# Altium PCB 1.pcbdoc
Units mil, origin at the board's own origin, x right, y up, seen from the top; angles counter-clockwise.
Board outline 6470 x 4120 mil, 2 copper layers (Top Layer, Bottom Layer); 42 components, 62 nets, 188 pads, 6 vias.
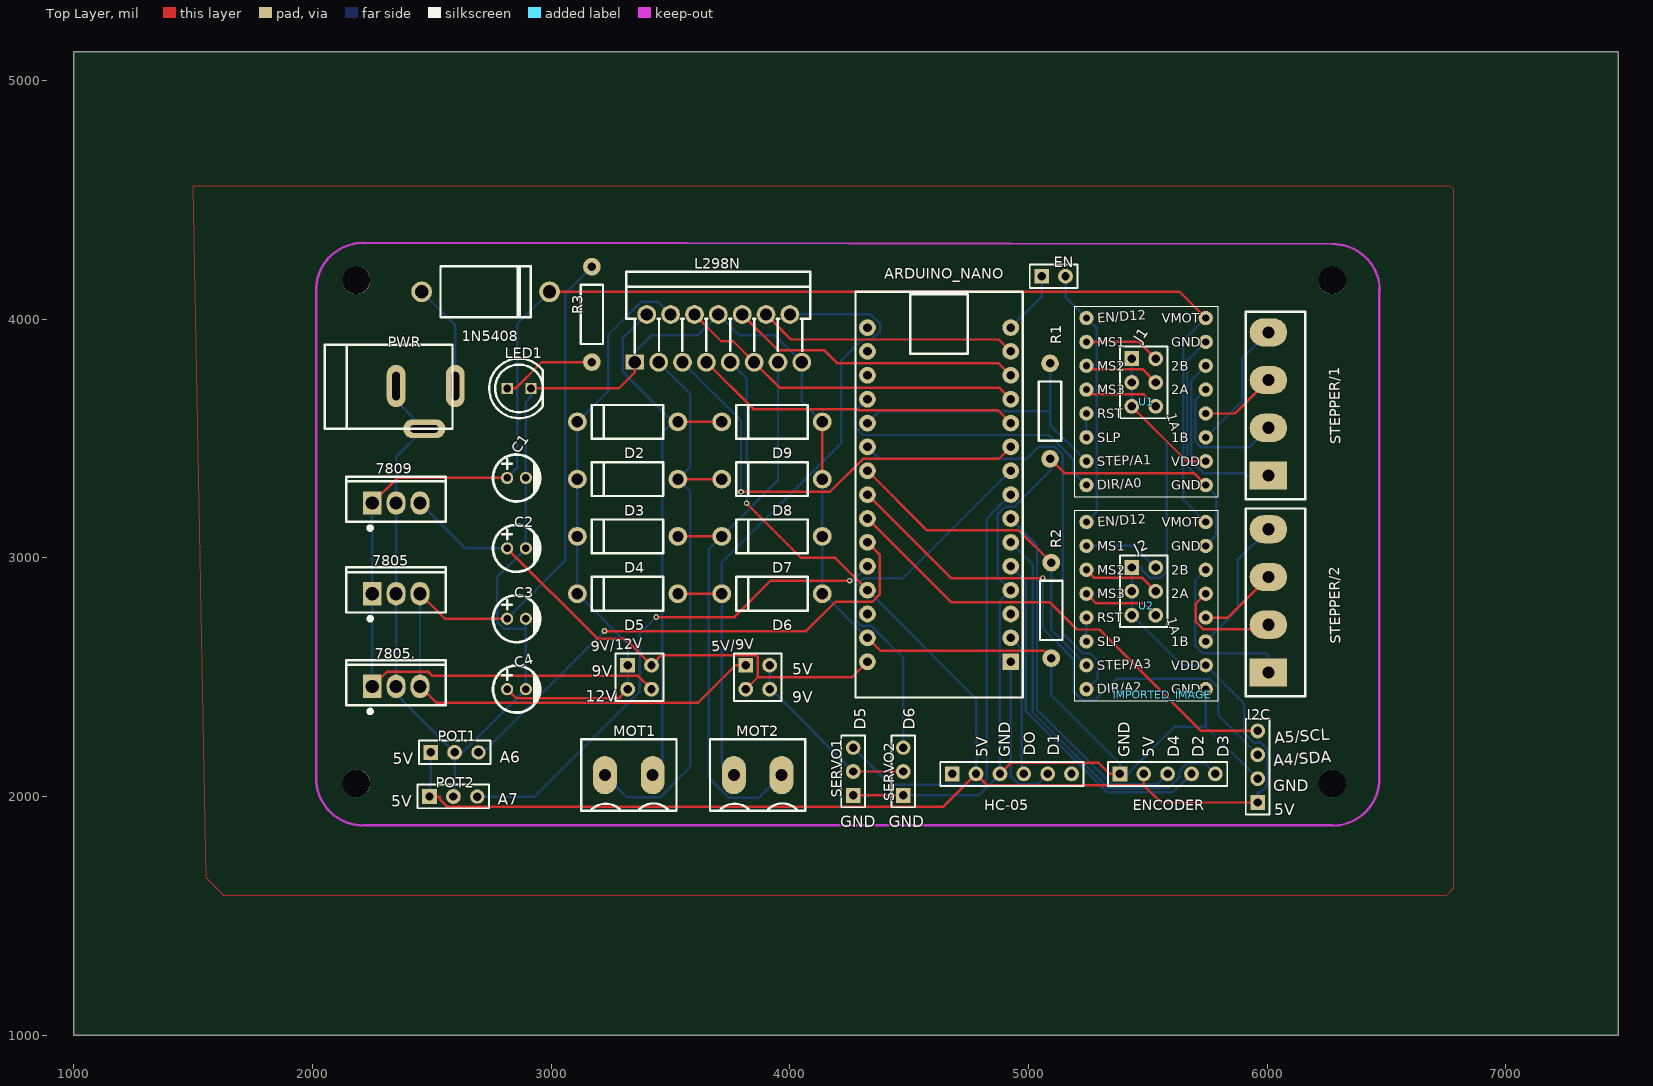
[diagram p0: Top Layer view]
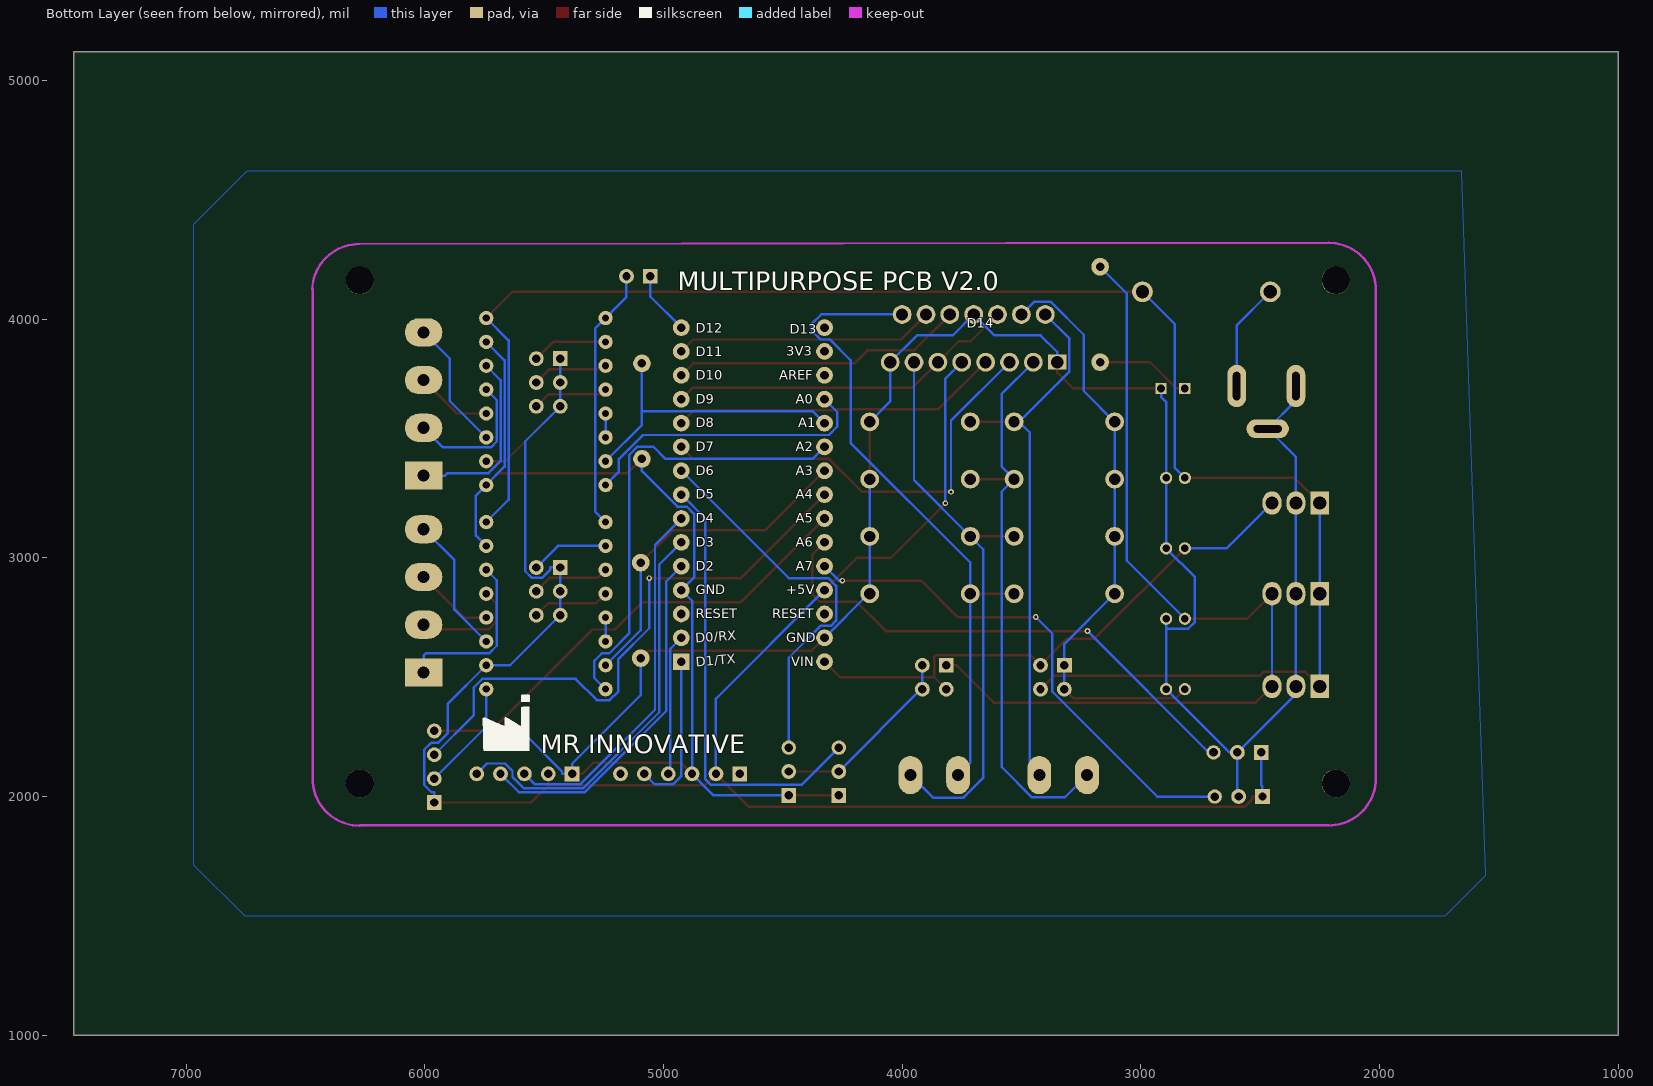
[diagram p1: Bottom Layer view, seen from below]

## Layer stack, top to bottom
Top Layer: signal copper (thickness not stored)
Dielectric: dielectric 12.6, FR-4, Dk 4.8
Bottom Layer: signal copper (thickness not stored)

## Board outline
7470,1000 1000,1000 1000,5120 7470,5120

## Components (designator, comment, footprint, x,y, rotation, side; value= is the part's Value field where it differs from the comment)
1N5408 "1N5408-C142336" DO-201_BD5.3-L9.5-P13.50-D1.4-RD 2725,4115 r180 top
5V/9V "5V/9V" HDR-M-2.54_2X2 3865,2500 r0 top
9V/12V "9V/RAW" HDR-M-2.54_2X2 3370,2500 r0 top
7805 "7805" TO-220-3_L10.0-W4.5-P2.54-L 2350,2850 r0 top
7805. "7805" TO-220-3_L10.0-W4.5-P2.54-L 2350,2461.61 r0 top
7809 "7809" TO-220-3_L10.0-W4.5-P2.54-L 2350,3230 r0 top
ARDUINO_NANO "ARDUINO_NANO_V3" ARDUINO_NANO_V3 4625,3265 r180 top
C1 "100uF" CAP-D5.0XF2.0 2815,3335 r0 top
C2 "1uF" CAP-D5.0XF2.0 2815,3040 r0 top
C3 "1uF" CAP-D5.0XF2.0 2815,2745 r0 top
C4 "47uF" CAP-D5.0XF2.0 2815,2450 r0 top
D2 "FR207" DO-15_BD3.1-L6.7-P10.70-D0.9-FD 3320,3570 r180 top
D3 "FR207" DO-15_BD3.1-L6.7-P10.70-D0.9-FD 3320,3330 r180 top
D4 "FR207" DO-15_BD3.1-L6.7-P10.70-D0.9-FD 3320,3090 r180 top
D5 "FR207" DO-15_BD3.1-L6.7-P10.70-D0.9-FD 3320,2850 r180 top
D6 "FR207" DO-15_BD3.1-L6.7-P10.70-D0.9-FD 3925,2850 r180 top
D7 "FR207" DO-15_BD3.1-L6.7-P10.70-D0.9-FD 3925,3090 r180 top
D8 "FR207" DO-15_BD3.1-L6.7-P10.70-D0.9-FD 3925,3330 r180 top
D9 "FR207" DO-15_BD3.1-L6.7-P10.70-D0.9-FD 3925,3570 r180 top
EN "HDR-F-2.54_1x2" HDR-F-2.54_1X2 5105,4180 r0 top
ENCODER "ENCODER" HDR-F-2.54_1X5 5582.5,2095 r0 top
HC-05 "HC-05" HDR-F-2.54_1X6 4880,2095 r0 top
I2C "I2C/DISPLAY" HDR-F-2.54_1X4 5960,2125 r90 top
IMPORTED_IMAGE "IMPORTED_IMAGE" IMPORTED_IMAGE 5559.3,2427.32 r0 top
J1 "HDR-M-2.54_2x3" HDR-M-2.54_2X3 5432.5,3835 r270 top
J2 "HDR-M-2.54_2x3" HDR-M-2.54_2X3 5432.5,2960 r270 top
L298N "L298N" MULTIWATT-15_L19.6-W5.0-P1.27-L 3700,3920 r0 top
LED1 "LED 5mm red" LED-5MM 2865,3710 r0 top
MOT1 "MOT1" 5.08-2P_SCREW_TERMINAL 3225,2090 r0 top
MOT2 "MOT2" 5.08-2P_SCREW_TERMINAL 3765,2090 r0 top
POT1 "POT1" HDR-F-2.54_1X3 2595,2185 r0 top
POT2 "POT2" HDR-F-2.54_1X3 2590,2000 r0 top
PWR "DC JACK" "DC JACK" 2350,3720 r0 top
R1 "200" R_AXIAL-0.4 5090,3615 r90 top
R2 "200" R_AXIAL-0.4 5095,2780 r90 top
R3 "200" R_AXIAL-0.4 3170,4020 r90 top
SERVO1 "SERVO1" HDR-F-2.54_1X3 4265,2105 r90 top
SERVO2 "SERVO2" HDR-F-2.54_1X3 4475,2105 r90 top
STEPPER/1 "STP1" SCREW_TERMINAL_5.08MM_4P_ANGLED 6005,3345 r90 top
STEPPER/2 "STP2" SCREW_TERMINAL_5.08MM_4P_ANGLED 6005,2520 r90 top
U1 "A4988" "A4988 STEPPER MOTOR DRIVER CARRIER" 5187.5,3255 r0 top
U2 "A4988" "A4988 STEPPER MOTOR DRIVER CARRIER" 5187.5,2400 r0 top

## Footprints (in the part's own frame and the unit in brackets; to place one, negate y for a bottom-side part, rotate by r counter-clockwise, add the part's x,y. Pads: shape width x height; smd on the part's side, far side on the other; paste and mask are expansions set on the pad)
5.08-2P_SCREW_TERMINAL [mil]
  oval 100x160 hole 50 paste+0 mask+4: 1(0,0) 2(200,0)
  silkscreen extent -100,-150 300,150
"A4988 STEPPER MOTOR DRIVER CARRIER" [mil]
  round 60 hole 30 paste+0 mask+4: 1(55,750) 2(55,650) 3(55,550) 4(55,450) 5(55,350) 6(55,250) 7(55,150) 8(55,50) 9(555,50) 10(555,150) 11(555,250) 12(555,350) 13(555,450) 14(555,550) 15(555,650) 16(555,750)
  silkscreen extent 5,0 605,800
ARDUINO_NANO_V3 [mil]
  rect 70x70 hole 36 paste+0 mask+4: 1(-300,700)
  round 70 hole 36 paste+0 mask+4: 2(-300,600) 3(-300,500) 4(-300,400) 5(-300,300) 6(-300,200) 7(-300,100) 8(-300,0) 9(-300,-100) 10(-300,-200) 11(-300,-300) 12(-300,-400) 13(-300,-500) 14(-300,-600) 15(-300,-700) 16(300,-700) 17(300,-600) 18(300,-500) 19(300,-400) 20(300,-300) 21(300,-200) 22(300,-100) 23(300,0) 24(300,100) 25(300,200) 26(300,300) 27(300,400) 28(300,500) 29(300,600) 30(300,700)
  silkscreen extent -350,-850 350,850
CAP-D5.0XF2.0 [mm]
  round 1.3 hole 0.8 paste+0 mask+0.102: 1(0,0) 2(2,0)
  silkscreen extent -1.5,-2.5 3.5,2.5
"DC JACK" [mm]
  oval 2x4.5 hole 0.8 slot 3 at 90 deg paste+0 mask+0.102: 1(6.3,0) 2(0,0)
  oval 4.5x2 hole 0.8 slot 3 at 0 deg paste+0 mask+0.102: 3(3,-4.549)
  silkscreen extent -7.6,-4.55 6,4.4
DO-15_BD3.1-L6.7-P10.70-D0.9-FD [mm]
  round 2 hole 1.2 paste+0 mask+0.102: 1(-5.35,0) 2(5.35,0)
  silkscreen extent -3.8,-1.8 3.8,1.8
DO-201_BD5.3-L9.5-P13.50-D1.4-RD [mm]
  round 2.2 hole 1.4 paste+0 mask+0.102: 1(-6.8,0) 2(6.8,0)
  silkscreen extent -4.8,-2.7 4.8,2.7
HDR-F-2.54_1X2 [mil]
  rect 62x62 hole 35 paste+0 mask+4: 1(-50,0)
  round 62 hole 35 paste+0 mask+4: 2(50,0)
  silkscreen extent -100,-49 100,50
HDR-F-2.54_1X3 [mil]
  rect 62x62 hole 35 paste+0 mask+4: 1(-100,0)
  round 62 hole 35 paste+0 mask+4: 2(0,0)
  round 60 hole 36 paste+0 mask+4: 3(100,0)
  silkscreen extent -150,-49 150,50
HDR-F-2.54_1X4 [mil]
  rect 62x62 hole 35 paste+0 mask+4: 1(-150,0)
  round 62 hole 35 paste+0 mask+4: 2(-50,0) 3(50,0) 4(150,0)
  silkscreen extent -200,-50 200,50
HDR-F-2.54_1X5 [mil]
  rect 62x62 hole 35 paste+0 mask+4: 1(-200,0)
  round 62 hole 35 paste+0 mask+4: 2(-100,0) 3(0,0) 4(100,0) 5(200,0)
  silkscreen extent -250,-50 250,50
HDR-F-2.54_1X6 [mil]
  rect 62x62 hole 35 paste+0 mask+4: 1(-200,0)
  round 62 hole 35 paste+0 mask+4: 2(-100,0) 3(0,0) 4(100,0) 5(200,0) 6(300,0)
  silkscreen extent -250,-50 350,50
HDR-M-2.54_2X2 [mil]
  rect 62x62 hole 35 paste+0 mask+4: 1(-50,50)
  round 62 hole 35 paste+0 mask+4: 2(50,50) 3(-50,-50) 4(50,-50)
  silkscreen extent -100,-100 100,100
HDR-M-2.54_2X3 [mil]
  rect 62x62 hole 35 paste+0 mask+4: 1(0,0)
  round 62 hole 35 paste+0 mask+4: 2(0,100) 3(100,0) 4(100,100) 5(200,0) 6(200,100)
  silkscreen extent -50,-50 250,150
IMPORTED_IMAGE [mil]
LED-5MM [mil]
  rect 47.7x47.7 hole 32 paste+0 mask+4: 1(-50,0) 2(50,0)
  silkscreen extent -125,-125 100,125
MULTIWATT-15_L19.6-W5.0-P1.27-L [mm]
  rect 2x1.6 hole 1.3 paste+0 mask+0.102: 1(-8.89,-2.54)
  round 2 hole 1.3 paste+0 mask+0.102: 2(-7.62,2.54) 3(-6.35,-2.54) 4(-5.08,2.54) 5(-3.81,-2.54) 6(-2.54,2.54) 7(-1.27,-2.54) 8(0,2.54) 9(1.27,-2.54) 10(2.54,2.54) 11(3.81,-2.54) 12(5.08,2.54) 13(6.35,-2.54) 14(7.62,2.54) 15(8.89,-2.54)
  silkscreen extent -9.8,-1.52 9.8,7.09
R_AXIAL-0.4 [mil]
  round 74 hole 35.4 paste+0 mask+4: 1(-200,0) 2(200,0)
  silkscreen extent -124,-47 124,47
SCREW_TERMINAL_5.08MM_4P_ANGLED [mm]
  rect 3x4 hole 1.3 paste+0 mask+0.102: 1(0,0)
  oval 3x4 hole 1.3 paste+0 mask+0.102: 2(5.08,0) 3(10.16,0) 4(15.24,0)
  silkscreen extent -2.55,-3.93 17.45,2.42
TO-220-3_L10.0-W4.5-P2.54-L [mm]
  rect 2x2.5 hole 1.4 paste+0 mask+0.102: 1(-2.54,0)
  oval 2x2.5 hole 1.4 paste+0 mask+0.102: 2(0,0) 3(2.54,0)
  silkscreen extent -5.3,-2.86 5.3,2.8

## Free pads (board coordinates)
  round 118.11 hole 118.11 unplated paste+0: ""(2182.5,2055) ""(2182.5,4163.75) ""(6272.5,2055) ""(6272.5,4163.75)

## Via types
v1: diameter 24.02, hole 12.2, Top Layer to Bottom Layer, tented both sides, 6 vias

## Nets (pads, with @x,y where several pads share a name; then routed paths per layer and width w, separated by ;. In a path a pad name is that pad's centre, name@x,y a point inside that pad or via, vN(x,y) a via of type N, cw(c..) or ccw(c..) an arc to the next point about the centre after c; other vN are vias at no path point)
5V: ARDUINO_NANO.27 ENCODER.2 HC-05.2 I2C.1 J1.1 J1.3 J1.5 J2.1 J2.3 J2.5 L298N.9 POT1.1 POT2.1 U1.10 U2.10 | length 8930
  Top Layer w10.24: POT2.1 2532.5,2000 2532.5,1989.4 2565.1,1956.8 4641.8,1956.8 HC-05.2 4828.2,2046.8 5482.5,2046.8 ; v1(3818.6,3228.8) 4047.5,2999.9 4190.1,2999.9 ARDUINO_NANO.27 ; J1.5 5662.5,3405 U1.10 ; ENCODER.2 5482.5,2046.8 ; I2C.1 5554.3,1975 5482.5,2046.8
  Bottom Layer w10.24: POT2.1 2490,2042.5 2495,2047.5 POT1.1 ; L298N.9 3818.6,3751.4 v1(3818.6,3228.8) ; ARDUINO_NANO.27 4780,2410 HC-05.2 ; J1.1 J1.3 J1.5 5579,3488.5 5579,2944 5552.5,2917.5 5506.9,2917.5 5475,2949.4 5475,2960 J2.1 J2.3 J2.5 5642.5,2550 U2.10 5903.3,2389.2 5903.3,2266.8 5945.1,2225 5973.8,2225 6002.5,2196.3 6002.5,2049.4 5970.6,2017.5 5960,2017.5 I2C.1
+5V: 5V/9V.1 7805.3 7805..3 C3.1 R3.2 | length 3877.4
  Top Layer w10.24: 7805..3 2518.6,2393 3615.5,2393 3772.5,2550 5V/9V.1 ; 7805.3 2555,2745 C3.1
  Bottom Layer w10.24: 7805..3 7805.3 ; C3.1 3058.5,2988.5 3058.5,4108.5 R3.2
+9V: 5V/9V.3 9V/12V.2 7809.3 ARDUINO_NANO.30 C2.1 | length 2360
  Top Layer w10.24: C2.1 3193.4,2661.6 3308.4,2661.6 9V/12V.2 3462.5,2592.5 3857.5,2592.5 3865,2585 3865,2500 ; 5V/9V.3 3865,2500 ; ARDUINO_NANO.30 4260,2500 3865,2500
  Bottom Layer w10.24: 7809.3 2640,3040 C2.1
A0: ARDUINO_NANO.19 U1.8 | length 1241
  Bottom Layer w10.24: ARDUINO_NANO.19 4271.5,3611.5 4271.5,3550.1 4306.7,3515 5086.2,3515 5188.1,3413 5188.1,3359.4 U1.8
A1: ARDUINO_NANO.20 R1.2 U1.7 | length 1258.9
  Bottom Layer w10.24: ARDUINO_NANO.20 4375,3615 5090,3615 ; R1.2 5090,3615 ; U1.7 5090,3557.5 5090,3615
A2: ARDUINO_NANO.21 U2.8 | length 1954.1
  Bottom Layer w10.24: ARDUINO_NANO.21 4375,3415 4991.8,3415 5042.8,3466 5107.9,3466 5143.6,3430.3 5143.6,2683.5 5227.1,2600 5258.5,2600 5289.8,2568.7 5289.8,2497.3 U2.8
A3: ARDUINO_NANO.22 R2.2 U2.7 | length 1420.6
  Top Layer w10.24: ARDUINO_NANO.22 4575,3115 4960,3115 R2.2
  Bottom Layer w10.24: R2.2 5095,2697.5 U2.7
A4: ARDUINO_NANO.23 I2C.3 | length 2431
  Top Layer w10.24: ARDUINO_NANO.23 4675,2915 v1(5059.5,2915)
  Bottom Layer w10.24: v1(5059.5,2915) 5059.5,2705.2 5188.7,2575.9 5188.7,2440.4 5225.3,2403.8 5278.9,2403.8 5368,2492.9 5758.9,2492.9 5793.9,2457.9 5793.9,2341.1 I2C.3
A5: ARDUINO_NANO.24 I2C.4 | length 2003.7
  Top Layer w10.24: ARDUINO_NANO.24 4675,2815 5088.1,2815 5203.1,2700 5297.8,2700 5722.8,2275 I2C.4
A6: ARDUINO_NANO.25 POT1.3 | length 2194.4
  Top Layer w10.24: v1(3223.5,2693.2) 4068,2693.2 4191.3,2816.5 4345.7,2816.5 4375.9,2846.7 4375.9,3014.1 ARDUINO_NANO.25
  Bottom Layer w10.24: POT1.3 2715.3,2185 v1(3223.5,2693.2)
A7: ARDUINO_NANO.26 POT2.3 | length 2177.1
  Top Layer w10.24: v1(3439.8,2752.1) 3767.2,2752.1 3919.7,2904.6 v1(4250.2,2904.6)
  Bottom Layer w10.24: POT2.3 2930.8,2000 3370,2439.2 3370,2682.3 v1(3439.8,2752.1) ; v1(4250.2,2904.6) 4264.6,2904.6 ARDUINO_NANO.26
ARDUINO_NANO_3: ARDUINO_NANO.3
ARDUINO_NANO_15: ARDUINO_NANO.15 EN.1 | length 268.8
  Bottom Layer w10.24: ARDUINO_NANO.15 5055,4095 EN.1
ARDUINO_NANO_16: ARDUINO_NANO.16
ARDUINO_NANO_17: ARDUINO_NANO.17
ARDUINO_NANO_18: ARDUINO_NANO.18
ARDUINO_NANO_28: ARDUINO_NANO.28
CN1_1: STEPPER/1.1 U1.14 | length 772.7
  Bottom Layer w10.24: U1.14 5682,3744.5 5682,3405.4 5732.4,3355 5904.8,3355 5914.8,3345 STEPPER/1.1
CN1_2: STEPPER/1.2 U1.13 | length 585.9
  Bottom Layer w10.24: U1.13 5698.6,3661.1 5698.6,3487.7 5723.1,3463.2 5923.2,3463.2 STEPPER/1.2
CN1_3: STEPPER/1.3 U1.12 | length 320.5
  Top Layer w10.24: U1.12 5865,3605 STEPPER/1.3
CN1_4: STEPPER/1.4 U1.11 | length 548.7
  Bottom Layer w10.24: U1.11 5895.5,3658 5895.5,3835.5 STEPPER/1.4
CN2_1: STEPPER/2.1 U2.14 | length 730.3
  Bottom Layer w10.24: U2.14 5698.6,2906.1 5698.6,2632 5730.7,2600 5995.6,2600 6005,2590.6 STEPPER/2.1
CN2_2: STEPPER/2.2 U2.13 | length 460.1
  Top Layer w10.24: U2.13 5700.7,2808.2 5700.7,2732.9 5733,2700.6 5985.6,2700.6 STEPPER/2.2
CN2_3: STEPPER/2.3 U2.12 | length 332.9
  Top Layer w10.24: U2.12 5835,2750 STEPPER/2.3
CN2_4: STEPPER/2.4 U2.11 | length 578.7
  Bottom Layer w10.24: U2.11 5875.6,2783.1 5875.6,2990.6 STEPPER/2.4
D0: ARDUINO_NANO.2 HC-05.4 | length 592.8
  Bottom Layer w10.24: ARDUINO_NANO.2 4971.5,2618.5 4971.5,2103.5 HC-05.4
D1: ARDUINO_NANO.1 HC-05.5 | length 666.7
  Bottom Layer w10.24: ARDUINO_NANO.1 4925,2086.2 4960.1,2051 5036.1,2051 HC-05.5
D2: ARDUINO_NANO.5 ENCODER.4 | length 1499.2
  Bottom Layer w10.24: ARDUINO_NANO.5 4988.2,2901.8 4988.2,2359 5328.7,2018.5 5606,2018.5 ENCODER.4
D3: ARDUINO_NANO.6 ENCODER.5 | length 1721.8
  Bottom Layer w10.24: ARDUINO_NANO.6 5017.6,2972.4 5017.6,2353.1 5335.1,2035.6 5586.4,2035.6 5632.5,2081.8 5632.5,2106.7 5664.2,2138.4 5739.1,2138.4 ENCODER.5
D4: ARDUINO_NANO.7 ENCODER.3 | length 1540.9
  Bottom Layer w10.24: ARDUINO_NANO.7 5035.3,3054.7 5035.3,2363.7 5346.7,2052.3 5539.8,2052.3 ENCODER.3
D5: ARDUINO_NANO.8 SERVO1.3 | length 1867.8
  Bottom Layer w10.24: SERVO1.3 4420.9,2049.1 4800.9,2049.1 4823.9,2072.1 4823.9,3163.9 ARDUINO_NANO.8
D6: ARDUINO_NANO.9 SERVO2.3 | length 1633.4
  Bottom Layer w10.24: SERVO2.3 4475,2581.6 4341.6,2715 4298.6,2715 4276.5,2737 4276.5,2882.7 4308.9,2915 4475,2915 ARDUINO_NANO.9
D7: ARDUINO_NANO.10 L298N.5 | length 1852.5
  Top Layer w10.24: v1(3795,3276.9) 4167.6,3276.9 4305.7,3415 4875,3415 ARDUINO_NANO.10
  Bottom Layer w10.24: L298N.5 3795,3575 v1(3795,3276.9)
D8: ARDUINO_NANO.11 L298N.7 | length 1380.6
  Top Layer w10.24: L298N.7 3846.7,3623.3 4280.4,3623.3 4285.3,3618.5 4871.5,3618.5 ARDUINO_NANO.11
D9: ARDUINO_NANO.12 L298N.6 L298N.11 | length 1472
  Top Layer w10.24: L298N.6 3712.5,3907.5 3762.5,3907.5 L298N.11 3956.3,3713.7 4876.3,3713.7 ARDUINO_NANO.12
D10: ARDUINO_NANO.13 L298N.10 | length 1230.6
  Top Layer w10.24: L298N.10 3949.1,3870.9 4143.5,3870.9 4199.4,3815 4875,3815 ARDUINO_NANO.13
D11: ARDUINO_NANO.14 L298N.12 | length 1089.2
  Top Layer w10.24: L298N.12 4005,3915 4875,3915 ARDUINO_NANO.14
D12: EN.2 U1.1 U2.1 | length 1102.6
  Bottom Layer w10.24: EN.2 5155,4092.5 U1.1 5286.4,3961.1 5286.4,3193.9 U2.1
GND: 7805.2 7805..2 7809.2 ARDUINO_NANO.4 ARDUINO_NANO.29 C1.2 C2.2 C3.2 C4.2 D6.1 D7.1 D8.1 D9.1 ENCODER.1 HC-05.3 I2C.2 L298N.1 L298N.8 L298N.15 LED1.2 POT1.2 POT2.2 PWR.2 PWR.3 R1.1 R2.1 SERVO1.1 SERVO2.1 U1.9 U1.15 U2.9 U2.15 | length 13107
  Top Layer w10.24: LED1.2 3283,3710 3350,3777 L298N.1 ; D8.1 D9.1 ; SERVO1.1 SERVO2.1 ; ARDUINO_NANO.29 4378.5,2611.5 5063.5,2611.5 R2.1 ; HC-05.3 4926.2,2141.2 5293.8,2141.2 5340,2095 ENCODER.1 ; R1.1 5150,3355 5692.5,3355 U1.9
  Bottom Layer w10.24: PWR.2 2350,3659 PWR.3 2350,3422.8 7809.2 7805.2 7805..2 2350,2430 POT1.2 ; POT2.2 2595,2005 POT1.2 ; C3.2 2893.7,2703.5 ; LED1.2 2915,3674.6 2893.7,3653.4 C1.2 C2.2 2772.9,2919.2 2772.9,2731.5 2801,2703.5 2893.7,2703.5 ; L298N.1 3350,3863 3419.5,3932.5 3612.5,3932.5 L298N.8 3787.5,3932.5 3937.5,3932.5 L298N.15 4050,3655.6 D9.1 ; D8.1 D7.1 D6.1 4140,2850 ARDUINO_NANO.29 ; SERVO2.1 4790,2005 HC-05.3 4878.5,2096.5 4878.5,2818.5 ARDUINO_NANO.4 4871.5,2918.5 4871.5,3184.4 4902.1,3215 4941.6,3215 5090,3363.4 R1.1 ; R2.1 5095,2425 5382.5,2137.5 ENCODER.1 5425,2095 5425,2105.6 5611.9,2292.5 5742.5,2292.5 ; U2.9 5742.5,2292.5 ; U2.15 5786.1,3093.6 5786.1,3261.4 U1.9 5665.3,3382.2 5665.3,3827.8 U1.15 ; I2C.2 5742.5,2292.5 ; POT1.2 2628.7,2185 C4.2 2893.7,2703.5
HC-05_1: HC-05.1
HC-05_6: HC-05.6
J1_2: J1.2 U1.2 | length 319
  Top Layer w10.24: U1.2 5462.5,3905 J1.2
J1_4: J1.4 U1.3 | length 319
  Top Layer w10.24: U1.3 5256.6,3790.9 5476.6,3790.9 J1.4
J1_6: J1.6 U1.4 | length 319
  Top Layer w10.24: U1.4 5262.5,3685 5482.5,3685 J1.6
J2_2: J2.2 U2.2 | length 327.3
  Bottom Layer w10.24: U2.2 5442.5,3050 J2.2
J2_4: J2.4 U2.3 | length 327.3
  Top Layer w10.24: U2.3 5276.6,2915.9 5476.6,2915.9 J2.4
J2_6: J2.6 U2.4 | length 327.3
  Top Layer w10.24: U2.4 5282.5,2810 5482.5,2810 J2.6
L298N_2: D2.1 D9.2 L298N.2 MOT1.2 | length 2298.8
  Top Layer w10.24: D2.1 D9.2
  Bottom Layer w10.24: L298N.2 3299.1,3919.1 3299.1,3780.5 D2.1@3509.6,3570 ; MOT1.2 3466,2131 3466,3526.4 D2.1@3509.6,3570 ; D2.1 D2.1@3509.6,3570
L298N_3: D3.1 D8.2 L298N.3 MOT1.1 | length 2426
  Top Layer w10.24: D3.1 D8.2
  Bottom Layer w10.24: MOT1.1 3318.6,1996.4 3455.2,1996.4 3582.3,2123.4 3582.3,3278.3 D3.1 3581.5,3380.9 3581.5,3688.5 L298N.3
L298N_4: 9V/12V.1 9V/12V.3 C4.1 D2.2 D3.2 D4.2 D5.2 L298N.4 | length 2503.2
  Top Layer w10.24: C4.1 2854,2411 3281,2411 9V/12V.3
  Bottom Layer w10.24: 9V/12V.3 9V/12V.1 3320,2639.4 D5.2 D4.2 D3.2 D2.2 3238.7,3699.3 3238.7,3934.9 3376.5,4072.7 3447.3,4072.7 L298N.4
L298N_13: D4.1 D7.2 L298N.13 MOT2.2 | length 2424.1
  Top Layer w10.24: D4.1 D7.2
  Bottom Layer w10.24: L298N.13 3950,3325.6 D7.2 3660.4,3036.1 3660.4,2077.5 3742.5,1995.4 3870.4,1995.4 MOT2.2
L298N_14: D5.1 D6.2 L298N.14 MOT2.1 | length 2788.8
  Top Layer w10.24: D5.1 D6.2
  Bottom Layer w10.24: MOT2.1 3714.4,2140.6 D6.2 3714.4,2981 4215.5,3482.1 4215.5,3828.1 4302.4,3915 4342.2,3915 4379.1,3951.9 4379.1,3979.6 4338.7,4020 L298N.14
LED1_1: LED1.1 R3.1 | length 400.6
  Top Layer w10.24: LED1.1 2850.4,3710 2960.4,3820 R3.1
PWR_1: 1N5408.2 PWR.1 | length 453.3
  Bottom Layer w10.24: 1N5408.2 2598,3974.3 PWR.1
S$52: 
S$56: 
S$61: 
S$63: 
SERVO1_2: 5V/9V.2 5V/9V.4 SERVO1.2 SERVO2.2 | length 802.9
  Top Layer w10.24: SERVO1.2 SERVO2.2
  Bottom Layer w10.24: 5V/9V.2 5V/9V.4 3920,2450 SERVO1.2
U1_5: U1.5 U1.6 | length 100
  Bottom Layer w10.24: U1.6 U1.5
U2_5: U2.5 U2.6 | length 100
  Bottom Layer w10.24: U2.6 U2.5
VCC: 1N5408.1 9V/12V.4 7805.1 7805..1 7809.1 C1.1 U1.16 U2.16 | length 8037.4
  Top Layer w10.24: 7805..1 2310.9,2522.5 2485.9,2522.5 2502.5,2505.9 3364.1,2505.9 9V/12V.4 ; 7809.1 2355,3335 C1.1 ; 1N5408.1 5632.5,4115 U1.16
  Bottom Layer w10.24: 7805..1 7805.1 7809.1 ; U2.16 5648.7,3243.8 5648.7,3911.2 U1.16 ; 2856.6,3376.6 2856.6,3978.9 ; 2856.6,3376.6 C1.1 2856.6,3376.6 ; 2856.6,3376.6 2856.6,3978.9 ; 2856.6,3978.9 1N5408.1 2856.6,3978.9

## Polygon pours and split planes (outlines as drawn)
GND on Bottom Layer (solid): 1655,4620 6745,4620 6970,4395 6970,1715 6755,1500 1725,1500 1555,1670
GND on Top Layer (solid): 1500,4560 6765,4560 6780,4545 6780,1615 6750,1585 1630,1585 1555,1660

## Keep-outs
Keep-Out Layer:
  lines w10: 2014.92,2075.75 ccw(c2211.77,2075.75) 2211.77,1878.9 ; 2014.92,4122.99 cw(c2211.77,4122.99) 2211.77,4319.84 ; 6273.15,1878.15 ccw(c6273.15,2075) 6470,2075 ; 6275,4315 cw(c6275,4118.15) 6471.72,4125.43

## Silkscreen, mask and mechanical layers (free items; w line width, h text height)
Top Overlay:
  text "5V" at 4010,2511.38 h47.24
  text "9V" at 3170,2501.38 h47.24
  text "12V" at 3145,2396.38 h47.24
  text "9V" at 4010,2393.88 h47.24
  text "D5" at 4318.62,2280 h47.24 r90
  text "D6" at 4523.62,2280 h47.24 r90
  text "A5/SCL" at 6031.65,2221.44 h47.24 r4
  text "DO" at 5028.62,2170 h47.24 r90
  text "D1" at 5128.62,2170 h47.24 r90
  text "5V" at 4828.62,2165 h47.24 r90
  text "GND" at 4923.62,2165 h47.24 r90
  text "GND" at 5423.62,2165 h47.24 r90
  text "5V" at 5527.16,2165 h47.24 r90
  text "D4" at 5630.69,2165 h47.24 r90
  text "D2" at 5734.23,2164.99 h47.24 r90
  text "D3" at 5837.76,2165.04 h47.24 r90
  text "A6" at 2785,2141.38 h47.24
  text "5V" at 2335,2136.38 h47.24
  text "A4/SDA" at 6026.65,2126.44 h47.24 r4
  text "GND" at 6025,2021.38 h47.24
  text "A7" at 2775,1966.38 h47.24
  text "5V" at 2330,1956.38 h47.24
  text "5V" at 6030,1921.38 h47.24
  text "GND" at 4210,1871.38 h47.24
  text "GND" at 4415,1871.38 h47.24
Bottom Overlay:
  text "MULTIPURPOSE PCB V2.0" at 4940,4120.63 h78.74
  text "D14" at 3730,3965.32 h39.37
  text "MR INNOVATIVE" at 5515,2180.63 h78.74

## Text inside footprints (layer, text, board x,y; h text height)
ARDUINO_NANO: Bottom Overlay "GND" at 4865.01,2846.8 h40; Bottom Overlay "D12" at 4865.01,3944.1 h40; Bottom Overlay "VIN" at 4465,2546.8 h40; Bottom Overlay "D13" at 4470,3940 h40; Bottom Overlay "D1/TX" at 4863.25,2544.18 h40 r355; Bottom Overlay "GND" at 4485,2646.8 h40; Bottom Overlay "+5V" at 4485,2846.8 h40; Bottom Overlay "A7" at 4445,2946.8 h40; Bottom Overlay "A6" at 4445,3046.8 h40; Bottom Overlay "A5" at 4445,3146.8 h40; Bottom Overlay "A4" at 4445,3246.8 h40; Bottom Overlay "A3" at 4445,3346.8 h40; Bottom Overlay "A2" at 4445,3446.8 h40; Bottom Overlay "A1" at 4435,3546.8 h40; Bottom Overlay "A0" at 4445,3646.8 h40; Bottom Overlay "AREF" at 4515,3746.8 h40; Bottom Overlay "D0/RX" at 4863.6,2644.15 h40 r356; Bottom Overlay "RESET" at 4865,2746.8 h40; Bottom Overlay "D2" at 4865.01,2946.8 h40; Bottom Overlay "D3" at 4865.01,3046.8 h40; Bottom Overlay "D4" at 4865.01,3146.8 h40; Bottom Overlay "D5" at 4865.01,3246.8 h40; Bottom Overlay "D6" at 4865.01,3346.8 h40; Bottom Overlay "D7" at 4865.01,3446.8 h40; Bottom Overlay "D8" at 4865.01,3546.8 h40; Bottom Overlay "D9" at 4865.01,3646.8 h40; Bottom Overlay "D10" at 4865.02,3746.8 h40; Bottom Overlay "D11" at 4865.02,3844.1 h40; Bottom Overlay "3V3" at 4485,3846.8 h40; Bottom Overlay "RESET" at 4545,2746.8 h40
U1: Top Overlay "MS1" at 5287.5,3885 h40; Top Overlay "MS2" at 5287.5,3785 h40; Top Overlay "MS3" at 5287.5,3685 h40; Top Overlay "STEP/A1" at 5288.2,3385.01 h40 r2; Top Overlay "DIR/A0" at 5288.55,3285.03 h40 r3; Top Overlay "GND" at 5597.5,3285 h40; Top Overlay "VDD" at 5597.5,3385 h40; Top Overlay "1B" at 5597.5,3485 h40; Top Overlay "1A" at 5578.27,3599.49 h40 r286; Top Overlay "2A" at 5597.5,3685 h40; Top Overlay "2B" at 5597.5,3785 h40; Top Overlay "GND" at 5597.5,3885 h40; Top Overlay "VMOT" at 5557.5,3985 h40; Top Overlay "EN/D12" at 5288.9,3985.05 h40 r4; Top Overlay "RST" at 5287.5,3585 h40; Top Overlay "SLP" at 5287.5,3485 h40
U2: Top Overlay "MS1" at 5287.5,3030 h40; Top Overlay "MS2" at 5287.5,2930 h40; Top Overlay "MS3" at 5287.5,2830 h40; Top Overlay "STEP/A3" at 5288.2,2530.01 h40 r2; Top Overlay "DIR/A2" at 5288.55,2430.03 h40 r3; Top Overlay "GND" at 5597.5,2430 h40; Top Overlay "VDD" at 5597.5,2530 h40; Top Overlay "1B" at 5597.5,2630 h40; Top Overlay "1A" at 5578.27,2744.49 h40 r286; Top Overlay "2A" at 5597.5,2830 h40; Top Overlay "2B" at 5597.5,2930 h40; Top Overlay "GND" at 5597.5,3030 h40; Top Overlay "VMOT" at 5557.5,3130 h40; Top Overlay "EN/D12" at 5288.9,3130.05 h40 r4; Top Overlay "RST" at 5287.5,2730 h40; Top Overlay "SLP" at 5287.5,2630 h40